# Altium PCB Pcb Design_Gas Detector.PcbDoc
Units mm, origin at the board's own origin, x right, y up, seen from the top; angles counter-clockwise.
Board outline 110.87 x 73.28 mm, 2 copper layers (Top Layer, Bottom Layer); 21 components, 13 nets, 80 pads, 0 vias.
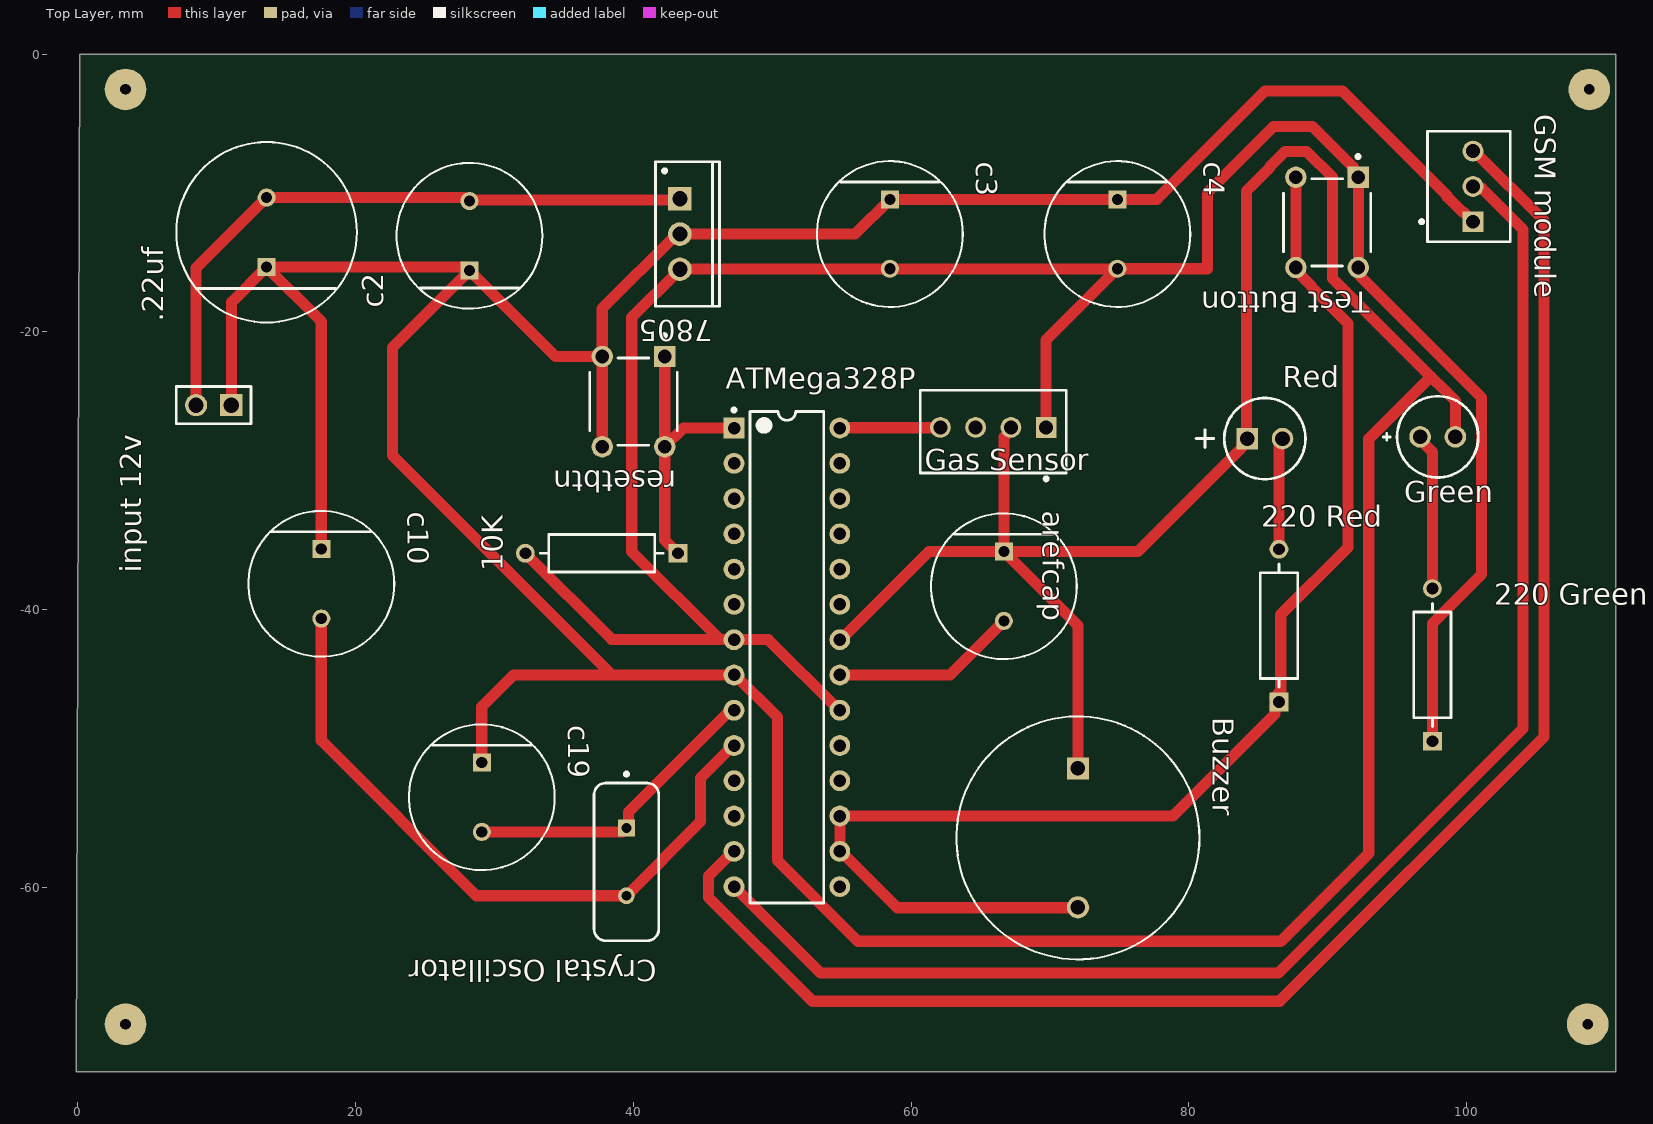
[diagram p0: Top Layer view]
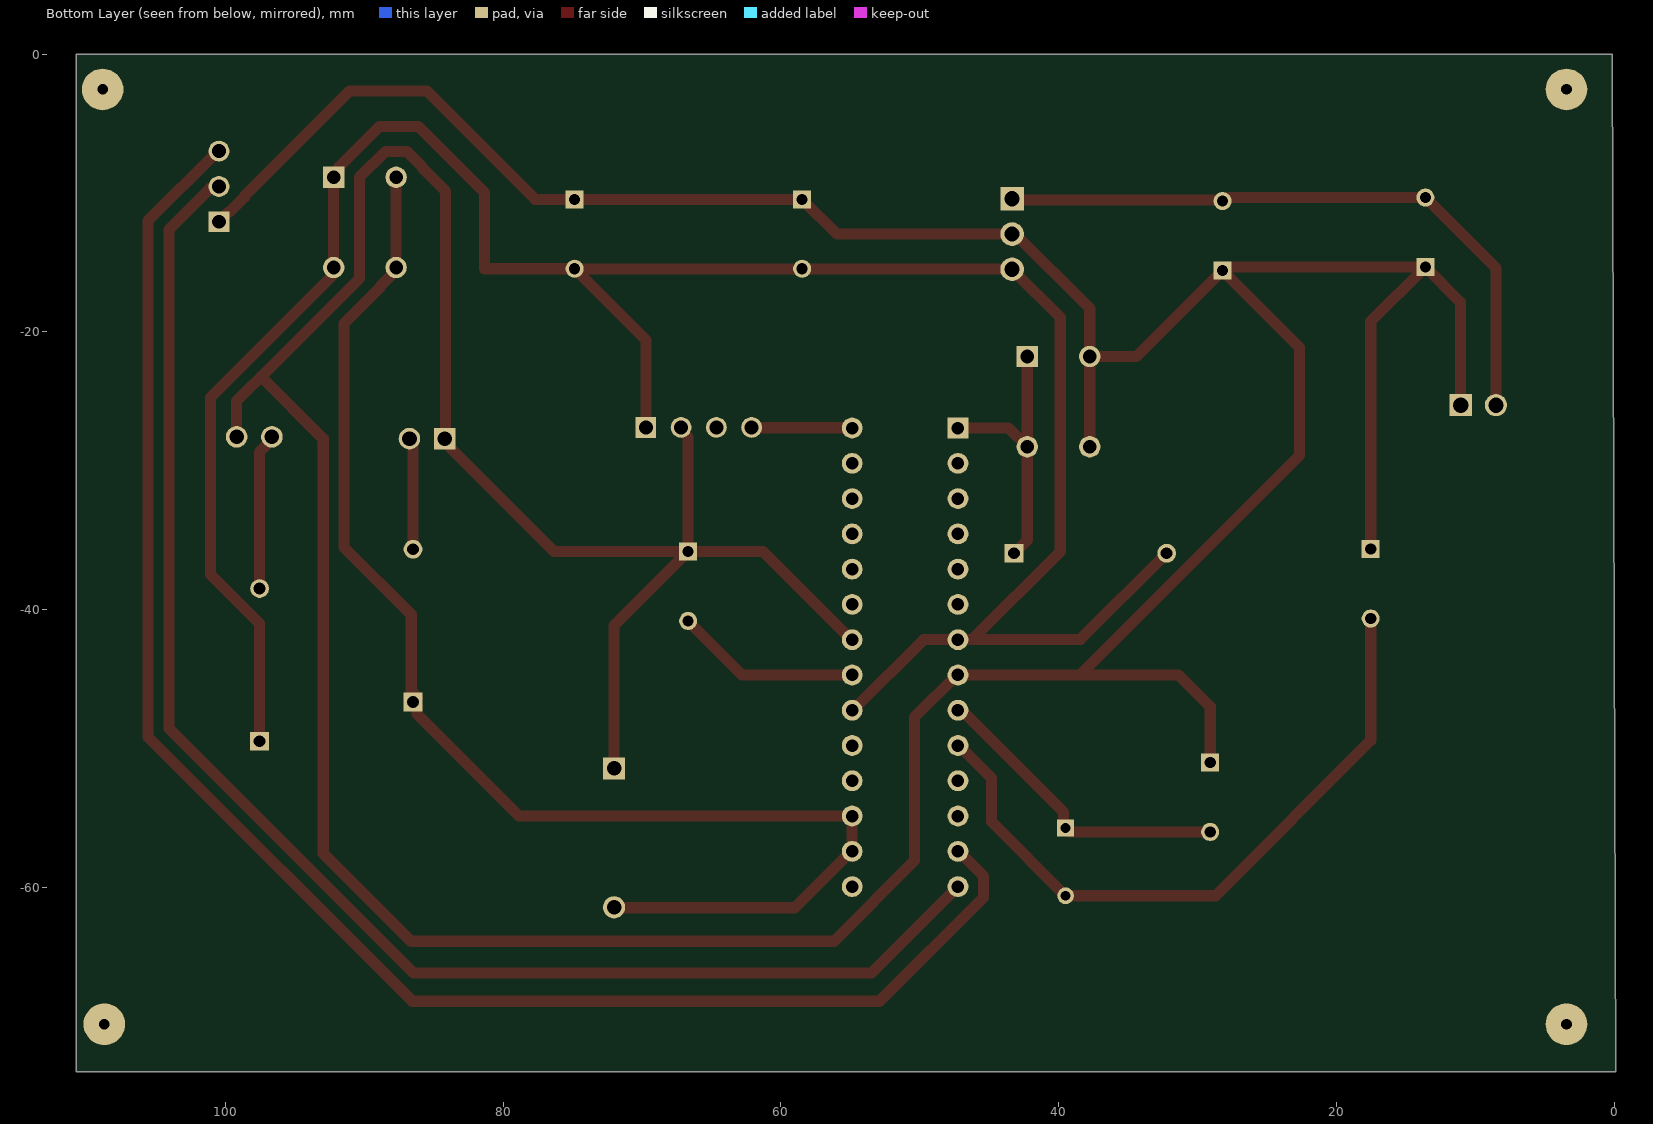
[diagram p1: Bottom Layer view, seen from below]

## Layer stack, top to bottom
Top Solder: solder mask 0.0102, Solder Resist, Dk 3.5
Top Layer: signal copper 0.0356
Dielectric 1: dielectric 0.32, FR-4, Dk 4.8
Bottom Layer: signal copper 0.0356
Bottom Solder: solder mask 0.0102, Solder Resist, Dk 3.5

## Board outline
0.127,0 110.744,0 110.744,-73.279 -0.127,-73.279

## Design rules (kind name [scope] priority, off if disabled: settings)
Clearance [All] p1: gap=0.7 ignorepadtopadclearanceinfootprint=FALSE
PolygonConnect [All] p1: connectstyle=Relief reliefconductorwidth=0.254 reliefentries=4 polygonreliefangle="90 Angle" airgapwidth=0.254
RoutingVias [All] p1: holewidth=0.711 width=1.27 viastyle="Through Hole" minholewidth=0.711 minwidth=1.27 maxholewidth=0.711 maxwidth=1.27
SolderMaskExpansion [All] p1: expansion=0.102 istentingtop=FALSE
Width [All] p1: maxlimit=2 minlimit=0.7 preferedwidth=0.8
30 further rules are at their usual default settings.

## Components (designator, comment, footprint, x,y, rotation, side; value= is the part's Value field where it differs from the comment)
10K "RNC55H1002FSB14" FP-RNC55-MFG 37.719,-35.941 r180 top
"220 Green" "RNC55H1002FSB14" FP-RNC55-MFG 97.536,-43.981 r90 top
"220 Red" "RNC55H1002FSB14" FP-RNC55-MFG 86.487,-41.148 r90 top
7805 "L7805CV" TO220 43.35,-12.954 r270 top
.22uf "C1" FP-RAD-TH-D_12_5_0_5-L_25-MFG 13.589,-12.827 r90 top
arefcap "0.1uf" FP-RAD-TH-D_10_0_5-L_20_2-MFG 66.675,-38.314 r270 top
ATMega328P "ATmega328-PU" 28P3 51.054,-43.434 r0 top
Buzzer "PKM17EPPH4001-B0" FP-PKM17EPPH4001-B0-MFG 72.009,-56.435 r270 top
c2 "0.1uf" FP-RAD-TH-D_10_0_5-L_20_2-MFG 28.194,-13.081 r90 top
c3 "10uf" FP-RAD-TH-D_10_0_5-L_20_2-MFG 58.463,-12.954 r270 top
c4 "1uf" FP-RAD-TH-D_10_0_5-L_20_2-MFG 74.846,-12.954 r270 top
c10 "22pf" FP-RAD-TH-D_10_0_5-L_20_2-MFG 17.526,-38.14 r270 top
c19 "22pf" FP-RAD-TH-D_10_0_5-L_20_2-MFG 29.083,-53.507 r270 top
"Crystal Oscillator" "FOXSLF/160-20" FOX-FOXSLF160-20 39.497,-58.166 r270 top
"Gas Sensor" "61900411121" 61900411121 65.913,-27.178 r0 top
Green "" AVAG-HLMP-3507 97.917,-27.559 r0 top
"GSM module" "61900311121" 61900311121 100.157,-9.525 r270 top
"input 12v" "61300211121" 61300211121 9.779,-25.273 r180 top
Red "HLMP-3301" AVAG-HLMP-3301-2 84.201,-27.686 r0 top
resetbtn "3-1825910-1" FP-3-1825910-1-MFG 40.005,-25.019 r270 top
"Test Button" "3-1825910-1" FP-3-1825910-1-MFG 89.952,-12.117 r270 top

## Footprints (in the part's own frame and the unit in brackets; to place one, negate y for a bottom-side part, rotate by r counter-clockwise, add the part's x,y. Pads: shape width x height; smd on the part's side, far side on the other; paste and mask are expansions set on the pad)
28P3 [mm] "28-Pin Plastic Dual In-Line Package (PDIP)"
  rect 1.5x1.5 hole 0.9: 1(-3.81,16.51)
  round 1.5 hole 0.9: 2(-3.81,13.97) 3(-3.81,11.43) 4(-3.81,8.89) 5(-3.81,6.35) 6(-3.81,3.81) 7(-3.81,1.27) 8(-3.81,-1.27) 9(-3.81,-3.81) 10(-3.81,-6.35) 11(-3.81,-8.89) 12(-3.81,-11.43) 13(-3.81,-13.97) 14(-3.81,-16.51) 15(3.81,-16.51) 16(3.81,-13.97) 17(3.81,-11.43) 18(3.81,-8.89) 19(3.81,-6.35) 20(3.81,-3.81) 21(3.81,-1.27) 22(3.81,1.27) 23(3.81,3.81) 24(3.81,6.35) 25(3.81,8.89) 26(3.81,11.43) 27(3.81,13.97) 28(3.81,16.51)
  silkscreen extent -3.93,-17.7 2.65,17.93, body extent -3.6,-17.65 3.6,17.65, height 4.58
61300211121 [mm] "Pin Header, pitch 2.54 mm, THT, Vertical, single row, 2p"
  rect 1.6x1.6 hole 1.1: 1(-1.27,0)
  round 1.6 hole 1.1: 2(1.27,0)
  silkscreen extent -2.69,-1.35 2.69,1.35, body extent -2.54,-1.27 2.54,1.27, height 8.57
61900311121 [mm] "2.54mm Male Locking Header, 3p"
  rect 1.5x1.5 hole 1: 1(2.54,0.3)
  round 1.5 hole 1: 2(0,0.3) 3(-2.54,0.3)
  silkscreen extent -3.98,-3.52 3.98,2.98, body extent -3.81,-2.9 3.81,2.9, height 11.53
61900411121 [mm] "2.54mm Male Locking Header, 4p"
  rect 1.5x1.5 hole 1: 1(3.81,0.3)
  round 1.5 hole 1: 2(1.27,0.3) 3(-1.27,0.3) 4(-3.81,0.3)
  silkscreen extent -5.25,-3.52 5.25,2.98, body extent -5.08,-2.9 5.08,2.9, height 11.53
AVAG-HLMP-3301-2 [mm] "THD, 2-Leads, Body Dia 5.85mm"
  rect 1.55x1.55 hole 1.05: 1(0,0)
  round 1.55 hole 1.05: 2(2.54,0)
  silkscreen extent -3.68,-2.92 4.19,2.92
AVAG-HLMP-3507 [mm] "THD, 2-Leads, Dia 5.845mm, Pitch 2.54mm"
  round 1.55 hole 1.05: 1(-1.27,0) 2(1.27,0)
  silkscreen extent -3.92,-2.92 2.92,2.92
FOX-FOXSLF160-20 [mm] "THD, 2-Leads, Body 11.35x4.65mm"
  rect 1.2x1.2 hole 0.7: 1(-2.44,0)
  round 1.2 hole 0.7: 2(2.44,0)
  silkscreen extent -6.45,-2.32 5.68,2.32
FP-3-1825910-1-MFG [mm]
  rect 1.54x1.54 hole 0.99 paste-1000 mask+0: 1(-3.25,2.25)
  round 1.54 hole 0.99 paste-1000 mask+0: 2(3.25,2.25) 3(-3.25,-2.25) 4(3.25,-2.25)
  silkscreen extent -4.87,-3.15 3.15,3.15, body extent -4.12,-3.24 4.12,3.24, height 0.25
FP-PKM17EPPH4001-B0-MFG [mm]
  rect 1.6x1.6 hole 1.05 paste-1000 mask+0: 1(-5,0)
  round 1.6 hole 1.05 paste-1000 mask+0: 2(5,0)
  silkscreen extent -8.75,-8.75 8.75,8.75
FP-RAD-TH-D_10_0_5-L_20_2-MFG [mm]
  rect 1.3x1.3 hole 0.8 paste-1000 mask+0: 1(-2.5,0)
  round 1.3 hole 0.8 paste-1000 mask+0: 2(2.5,0)
  silkscreen extent -5.25,-5.25 5.25,5.25
FP-RAD-TH-D_12_5_0_5-L_25-MFG [mm]
  rect 1.3x1.3 hole 0.8 paste-1000 mask+0: 1(-2.5,0)
  round 1.3 hole 0.8 paste-1000 mask+0: 2(2.5,0)
  silkscreen extent -6.5,-6.5 6.5,6.5
FP-RNC55-MFG [mm]
  rect 1.35x1.35 hole 0.85 paste-1000 mask+0: 1(-5.5,0)
  round 1.35 hole 0.85 paste-1000 mask+0: 2(5.5,0)
  silkscreen extent -4.43,-1.35 4.43,1.35, body extent -6.27,-1.45 6.27,1.45, height 0.25
TO220 [mm] "TO, Thru-Hole, Vertical, Heatsink Mounted; 3 In-Line Leads; Pitch 2.54 mm"
  rect 1.7x1.7 hole 1.1: 1(-2.54,0)
  round 1.7 hole 1.1: 2(0,0) 3(2.54,0)
  silkscreen extent -5.2,-1.75 5.2,2.85, body extent -5.25,-1.8 5.25,2.9, height 19.7

## Part data
10K "220 Green" "220 Red": library part CMP-02408-000004-1, "RES 10K OHM 1/8W 1% AXIAL"
7805: library part CMP-0244-00483-1, "Positive Voltage Regulator, 5V, 3-Pin TO-220"
.22uf: library part CMP-05427-000913-1, "Aluminum Electrolytic Capacitors (Radial Lead Type) 22uF ±20% 400V"
arefcap c2 c3 c4 c10 c19: library part CMP-05427-000214-1, "Aluminum Electrolytic Capacitors (Radial Lead Type) 10uF ±20% 400V"
ATMega328P: library part CMP-0095-00015-2, "8-bit AVR Microcontroller, 32KB Flash, 1KB EEPROM, 2KB SRAM, 28-pin PDIP, Industrial Grade (-40°C to 85°C)"
Buzzer: library part CMP-06202-000027-1, "AUDIO PIEZO TRANSDUCER 25V TH"
"Crystal Oscillator": library part CMP-1749-00003-1, "Resistance Weld Thru-Hole Crystal, 16 MHz, -20 to 70 degC, 2-Pin THD, RoHS, Bulk"
"Gas Sensor": library part CMP-1502-00586-1, "Male Locking Header WR-WTB, THT, Vertical, pitch 2.54 mm, 1 x 4 position"
Green: library part CMP-2000-06412-1, "T-1 3/4 (5 mm) Diffused LED Lamp, Green, 2.1 V, -20 to 100 degC, 2-Pin THD, RoHS, Bulk"
"GSM module": library part CMP-1502-00585-1, "Male Locking Header WR-WTB, THT, Vertical, pitch 2.54 mm, 1 x 3 position"
"input 12v": library part CMP-1712-00002-4, "THT Vertical Pin Header WR-PHD, Pitch 2.54 mm, Single Row, 2 pins"
Red: library part CMP-2000-06411-1, "T-1 3/4 (5 mm) Diffused LED Lamp, 1.9 V, -40 to 100 degC, 2-Pin THD, RoHS, Bulk"
resetbtn "Test Button": library part CMP-03407-000001-1, "SWITCH TACTILE SPST-NO 0.05A 24V"

## Free pads (board coordinates)
  round 3 hole 0.762: 2(3.429,-2.54) 3(108.839,-2.54) 4(3.429,-69.85) 5(108.712,-69.85)

## Nets (pads, with @x,y where several pads share a name; then routed paths per layer and width w, separated by ;. In a path a pad name is that pad's centre, name@x,y a point inside that pad or via, vN(x,y) a via of type N, cw(c..) or ccw(c..) an arc to the next point about the centre after c; other vN are vias at no path point)
5v: 10K.2 7805.3 "220 Green.1" "Gas Sensor.1" "Test Button.1" "Test Button.2" ATMega328P.7 ATMega328P.20 c3.2 c4.2 | length 175.1
  Top Layer w0.8: 10K.2 38.442,-42.164 46.228,-42.164 39.878,-35.814 39.878,-18.966 7805.3 43.37,-15.474 58.463,-15.474 c4.2@74.826,-15.474 ; ATMega328P.7@46.536,-42.164 ATMega328P.7 ; ATMega328P.7@47.168,-42.164 49.708,-42.164 54.788,-47.244 ATMega328P.20 ; 69.723,-26.878 69.723,-20.577 c4.2@74.826,-15.474 ; 97.536,-49.481 97.536,-40.991 101.062,-37.465 101.062,-24.735 92.344,-16.017 92.344,-15.509 92.202,-15.367 92.202,-8.867 91.832,-8.497 91.832,-8.139 88.9,-5.207 86.106,-5.207 81.335,-9.978 81.335,-15.454 c4.2 c4.2@74.826,-15.474
12v: 7805.1 "input 12v.2" .22uf.2 c2.2 | length 47
  Top Layer w0.8: 8.509,-25.273 8.509,-15.407 .22uf.2 27.805,-10.327 28.059,-10.581 c2.2 28.277,-10.497 43.267,-10.497 7805.1
GND: 7805.2 "Gas Sensor.2" "GSM module.1" "input 12v.1" .22uf.1 arefcap.1 ATMega328P.8 ATMega328P.22 Buzzer.1 c2.1 c3.1 c4.1 c10.1 c19.1 Green.2 Red.1 resetbtn.3 resetbtn.4 | length 412.6
  Top Layer w0.8: 11.049,-25.273 11.049,-17.867 .22uf.1 ; c10.1 17.526,-19.264 .22uf.1 ; c2.1@27.94,-15.327 .22uf.1 ; c2.1 22.661,-21.114 22.661,-28.894 38.472,-44.704 ; c2.1@28.444,-15.831 34.382,-21.769 resetbtn.3 ; c19.1 29.083,-46.99 31.369,-44.704 38.472,-44.704 ; resetbtn.4 resetbtn.3 ; ATMega328P.8 38.472,-44.704 ; ATMega328P.8@47.282,-44.666 50.364,-47.748 50.364,-58.06 56.185,-63.881 86.614,-63.881 92.951,-57.544 92.951,-27.698 97.427,-23.222 ; ATMega328P.22 54.94,-42.164 61.29,-35.814 arefcap.1 ; 67.183,-26.878 67.183,-27.067 66.675,-27.575 arefcap.1 ; Buzzer.1 72.009,-41.148 arefcap.1 ; Red.1@84.191,-27.696 83.826,-28.061 83.826,-28.315 76.327,-35.814 arefcap.1 ; Red.1 84.201,-27.375 84.138,-27.311 84.138,-9.848 85.832,-8.154 85.832,-8.092 86.927,-6.997 88.477,-6.997 90.332,-8.852 90.332,-10.093 90.332,-16.142 96.596,-22.406 96.612,-22.406 99.187,-24.981 Green.2 ; 100.457,-12.065 99.767,-11.375 99.691,-11.375 98.607,-10.291 98.607,-10.215 91.059,-2.667 85.471,-2.667 77.684,-10.454 c4.1 c3.1 55.963,-12.954 7805.2 43.132,-12.954 37.755,-18.331 resetbtn.3
Net10K_1: 10K.1 ATMega328P.1 resetbtn.1 resetbtn.2 | length 20.1
  Top Layer w0.8: resetbtn.1 resetbtn.2 ; 10K.1 42.255,-34.977 resetbtn.2 ; ATMega328P.1 43.6,-26.924 resetbtn.2
"Net220 Green_2": "220 Green.2" Green.1 | length 11.3
  Top Layer w0.8: Green.1 96.647,-27.762 97.536,-28.651 97.536,-38.481
"Net220 Red_1": "220 Red.1" "Test Button.3" "Test Button.4" ATMega328P.16 ATMega328P.17 Buzzer.2 | length 98.4
  Top Layer w0.8: Buzzer.2@72.45,-61.468 59.004,-61.468 54.94,-57.404 ATMega328P.16 ATMega328P.17 78.867,-54.864 86.212,-47.519 86.212,-46.923 86.487,-46.648 ; 86.15,-46.311 86.614,-45.847 86.614,-40.356 91.451,-35.52 91.451,-19.382 88.832,-16.763 88.832,-16.697 87.702,-15.567 87.702,-8.867
"Net220 Red_2": "220 Red.2" Red.2 | length 8.1
  Top Layer w0.8: 86.487,-35.648 86.487,-28.143 86.741,-27.889 Red.2
Netarefcap_2: arefcap.2 ATMega328P.21 | length 13.4
  Top Layer w0.8: ATMega328P.21 62.785,-44.704 arefcap.2
NetATMega328P_9: "Crystal Oscillator.1" ATMega328P.9 c19.2 | length 22.4
  Top Layer w0.8: c19.2 39.216,-56.007 39.651,-55.572 39.651,-54.583 46.856,-47.378 47.11,-47.378 ATMega328P.9
NetATMega328P_10: "Crystal Oscillator.2" ATMega328P.10 c10.2 | length 49.5
  Top Layer w0.8: c10.2 17.526,-49.43 28.702,-60.606 39.497,-60.606 44.837,-55.266 44.837,-52.115 47.168,-49.784 ATMega328P.10
NetATMega328P_13: "GSM module.3" ATMega328P.13 | length 119.3
  Top Layer w0.8: ATMega328P.13 47.168,-57.404 45.394,-59.178 45.394,-60.71 52.883,-68.199 86.539,-68.199 105.562,-49.176 105.562,-11.993 100.707,-7.138 100.686,-7.138
NetATMega328P_14: "GSM module.2" ATMega328P.14 | length 107.6
  Top Layer w0.8: ATMega328P.14 53.467,-66.167 86.449,-66.167 104.062,-48.554 104.062,-12.614 101.107,-9.659 100.466,-9.659 100.33,-9.523
NetATMega328P_28: "Gas Sensor.4" ATMega328P.28 | length 7.3
  Top Layer w0.8: ATMega328P.28 54.887,-26.901 62.08,-26.901 62.103,-26.878
pads on no net: "Gas Sensor.3" ATMega328P.2 ATMega328P.3 ATMega328P.4 ATMega328P.5 ATMega328P.6 ATMega328P.11 ATMega328P.12 ATMega328P.15 ATMega328P.18 ATMega328P.19 ATMega328P.23 ATMega328P.24 ATMega328P.25 ATMega328P.26 ATMega328P.27